# Allegro board demob.brd
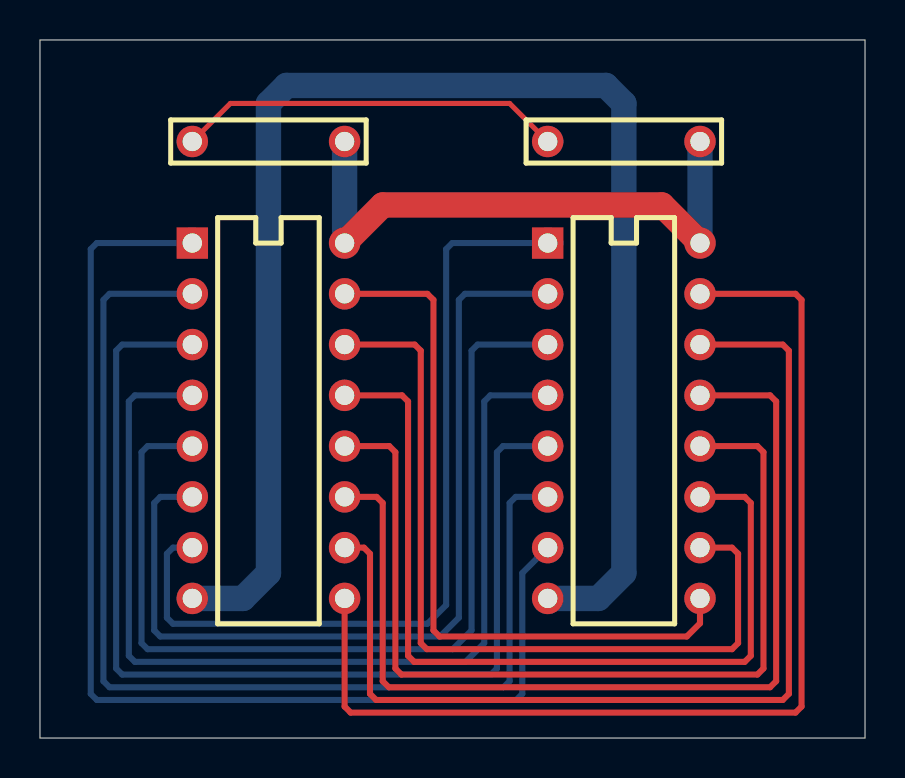
[diagram p0: board, top side]
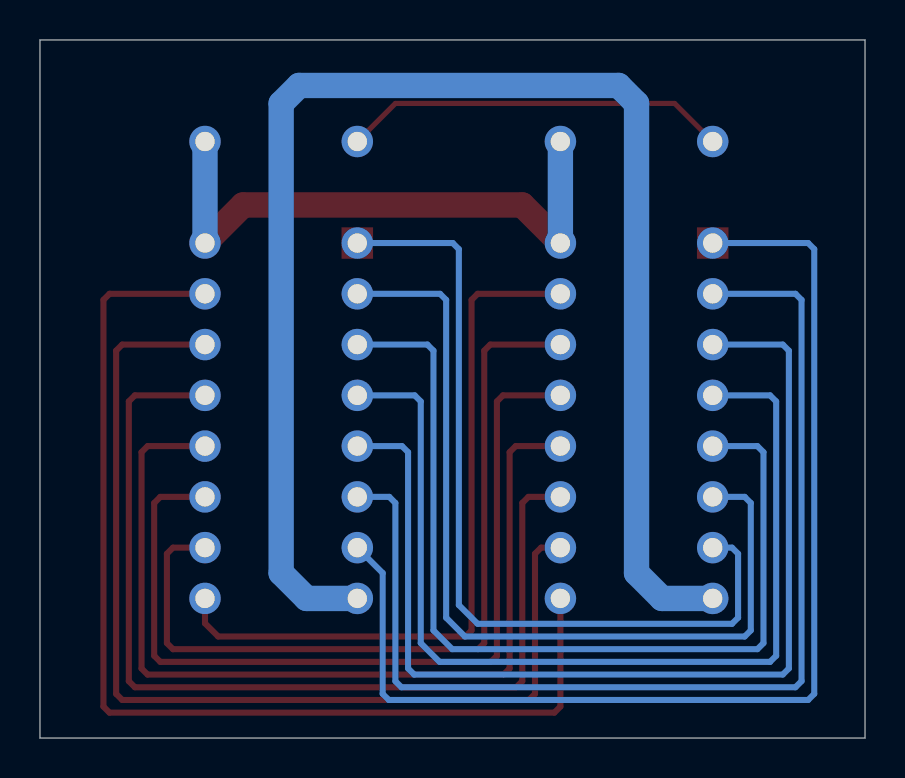
[diagram p1: board, bottom side, seen from below]

Outline 41.27 x 34.93 mm; copper layers: TOP, GND, POWER, INNER1, INNER2, BOTTOM. Coordinates in mm from the lower left corner of the outline.
Outline path: 0,34.93 41.27,34.93 41.27,0 0,0 0,34.93

## Design rules (mm)
nets with their own width: min track width 0.254; nets GND_SIGNAL
nets with their own width: min track width 0.305; nets N01899 N01900 N01901 N01902 N01903 N01904 N01905 N01906 N01907 N01908 N01909 N01910 N01911 N01912
nets with their own width: min track width 1.27; nets GND VCC

## Placement (name value [footprint] x y rotation side)
C1  CAP NP  [AC300100A]  15.24 29.85 180 top
C2  CAP NP  [AC300100A]  33.02 29.85 180 top
U1  74LS158  [DIP16]  7.62 24.77 270 top
U2  74LS158  [DIP16]  25.4 24.77 270 top

## Library data of the parts
C1 C2 = CAP_NP
U1 U2 = 74LS158

## Footprints (pads in the part's own frame, mm; a bottom-side part is the same pattern mirrored in y, then rotated)
AC300100A
  round 1.575 hole 0.965: 1(0,0) 2(7.62,0)
DIP16
  rect 1.575x1.575 hole 0.965: 1(0,0)
  round 1.575 hole 0.965: 2(2.54,0) 3(5.08,0) 4(7.62,0) 5(10.16,0) 6(12.7,0) 7(15.24,0) 8(17.78,0) 9(17.78,7.62) 10(15.24,7.62) 11(12.7,7.62) 12(10.16,7.62) 13(7.62,7.62) 14(5.08,7.62) 15(2.54,7.62) 16(0,7.62)

## Nets
GND: U1.8(TP-8) U2.8(TP-8)
GND_SIGNAL: C1.2(TP-2) C2.2(TP-2)
VCC: C1.1(TP-1) C2.1(TP-1) U1.16(TP-16) U2.16(TP-16)
N01899: U1.2(TP-2) U2.6(TP-6)
N01900: U1.3(TP-3) U2.5(TP-5)
N01901: U1.4(TP-4) U2.4(TP-4)
N01902: U1.5(TP-5) U2.3(TP-3)
N01903: U1.6(TP-6) U2.2(TP-2)
N01904: U1.7(TP-7) U2.1(TP-1)
N01905: U1.9(TP-9) U2.15(TP-15)
N01906: U1.10(TP-10) U2.14(TP-14)
N01907: U1.11(TP-11) U2.13(TP-13)
N01908: U1.12(TP-12) U2.12(TP-12)
N01909: U1.14(TP-14) U2.10(TP-10)
N01910: U1.1(TP-1) U2.7(TP-7)
N01911: U1.13(TP-13) U2.11(TP-11)
N01912: U1.15(TP-15) U2.9(TP-9)

## Routing (per net, layer and track width the routed paths; a pad name or vN(x,y) marks a point on that pad's centre or on a via; arc(x,y) is an arc through that point)
GND: length 74.2
  BOTTOM w1.27: U1.8 10.16,6.99 11.43,8.25 11.43,31.75 12.33,32.65 28.31,32.65 29.21,31.75 29.21,8.25 27.94,6.99 U2.8
GND_SIGNAL: length 19.4
  TOP w0.254: C1.2 9.53,31.75 23.5,31.75 C2.2
VCC: length 29.5
  TOP w1.27: U1.16 17.14,26.67 31.11,26.67 U2.16
  BOTTOM w1.27: C1.1 U1.16 ; C2.1 U2.16
N01899: length 55.2
  BOTTOM w0.305: U2.6 23.8,12.07 23.5,11.76 23.5,2.84 23.19,2.54 3.48,2.54 3.17,2.84 3.17,21.92 3.48,22.22 U1.2
N01900: length 52.6
  BOTTOM w0.305: U1.3 4.11,19.68 3.81,19.38 3.81,3.48 4.11,3.17 22.56,3.17 22.86,3.48 22.86,14.3 23.16,14.61 U2.5
N01901: length 49.7
  BOTTOM w0.305: U2.4 22.53,17.14 22.23,16.84 22.23,4.75 21.29,3.81 4.75,3.81 4.45,4.11 4.45,16.84 4.75,17.14 U1.4
N01902: length 47.2
  BOTTOM w0.305: U1.5 5.38,14.61 5.08,14.3 5.08,4.75 5.38,4.45 20.65,4.45 21.59,5.38 21.59,19.38 21.89,19.68 U2.3
N01903: length 44.6
  BOTTOM w0.305: U1.6 6.02,12.07 5.71,11.76 5.71,5.38 6.02,5.08 20.02,5.08 20.95,6.02 20.95,21.92 21.26,22.22 U2.2
N01904: length 42.1
  BOTTOM w0.305: U2.1 20.62,24.77 20.32,24.46 20.32,6.65 19.38,5.72 6.65,5.72 6.35,6.02 6.35,9.22 6.65,9.52 U1.7
N01905: length 54.1
  TOP w0.305: U1.9 15.24,1.57 15.54,1.27 37.8,1.27 38.1,1.57 38.1,21.92 37.8,22.22 U2.15
N01906: length 51.4
  TOP w0.305: U1.10 16.21,9.52 16.51,9.22 16.51,2.21 16.81,1.91 37.16,1.91 37.47,2.21 37.47,19.38 37.16,19.68 U2.14
N01907: length 48.8
  TOP w0.305: U1.11 16.84,12.07 17.14,11.76 17.14,2.84 17.45,2.54 36.53,2.54 36.83,2.84 36.83,16.84 36.53,17.14 U2.13
N01908: length 46.3
  TOP w0.305: U2.12 35.89,14.61 36.2,14.3 36.2,3.48 35.89,3.17 18.08,3.17 17.78,3.48 17.78,14.3 17.48,14.61 U1.12
N01909: length 41.2
  TOP w0.305: U1.14 18.75,19.68 19.05,19.38 19.05,4.75 19.35,4.45 34.62,4.45 34.92,4.75 34.92,9.22 34.62,9.52 U2.10
N01910: length 57.1
  BOTTOM w0.305: U1.1 2.84,24.77 2.54,24.46 2.54,2.21 2.84,1.91 23.83,1.91 24.13,2.21 24.13,8.25 U2.7
N01911: length 43.7
  TOP w0.305: U2.11 35.26,12.07 35.56,11.76 35.56,4.11 35.26,3.81 18.72,3.81 18.41,4.11 18.41,16.84 18.11,17.14 U1.13
N01912: length 36.1
  TOP w0.305: U1.15 19.38,22.22 19.68,21.92 19.68,5.38 19.99,5.08 32.36,5.08 33.02,5.74 U2.9
